# EAGLE board A-2 brd (EAGLE 9.6.2)
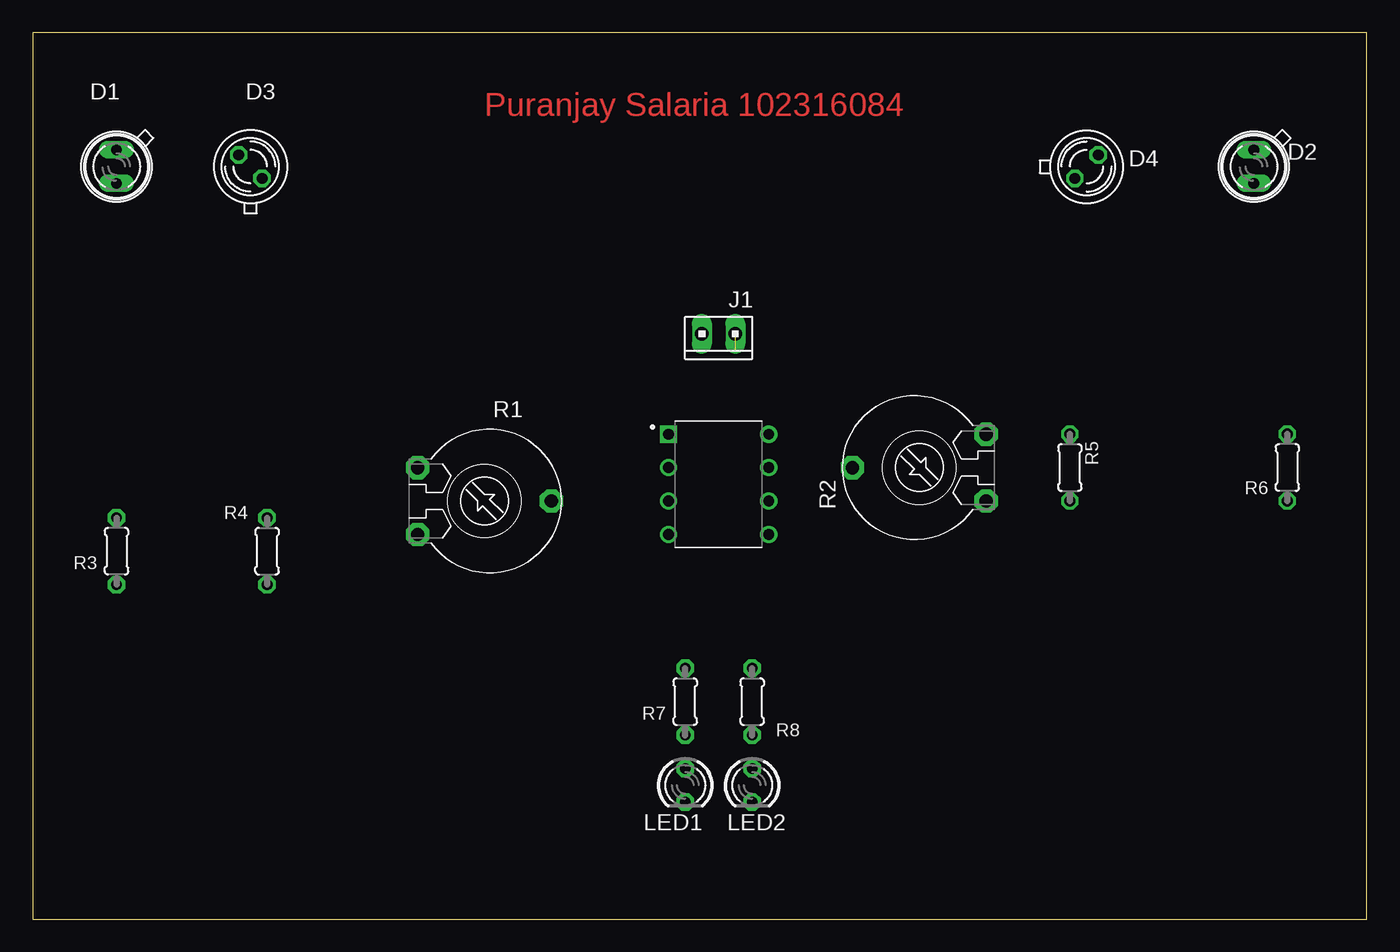
[diagram p0: board, top side]
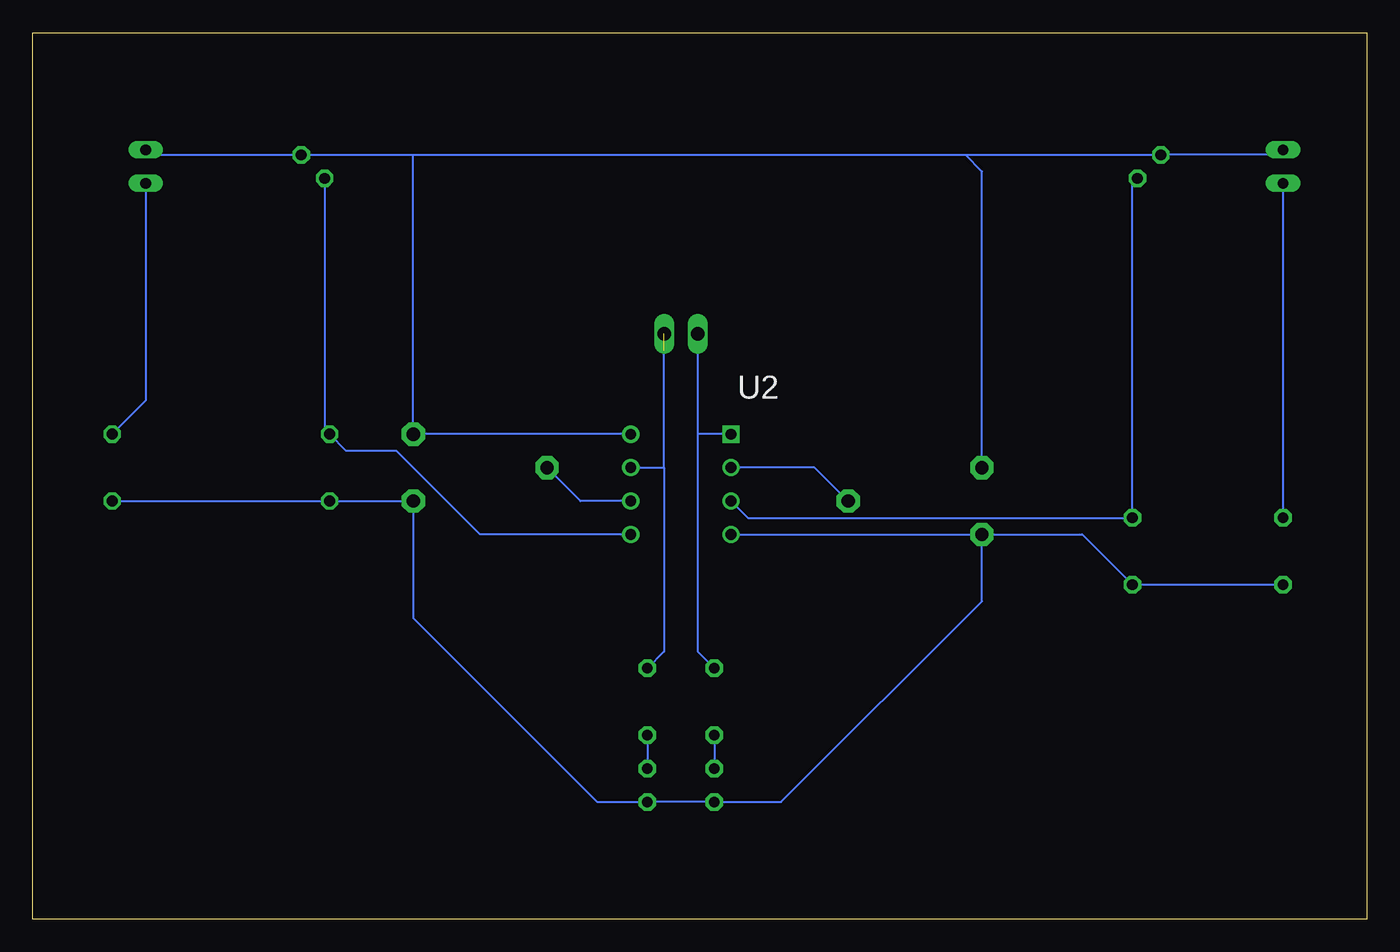
[diagram p1: board, bottom side, seen from below]

Size 101.27 x 67.3 mm. Coordinates in mm from the lower left corner, seen from the top.
Outline: 0,0 101.27,0 101.27,67.3 0,67.3 0,0
Copper layers (1*16): Top 0.035mm / dielectric 1.5mm / Bottom 0.035mm
Design rules "default": minimum track width 6mil, minimum drill 0.35mm, track to track 6mil, track to pad 6mil, pad to pad 6mil, via to via 6mil, smd to smd 6mil, copper to edge 40mil, drill to drill 6mil, minimum pad ring 10mil, minimum via ring 8mil, stop-mask expansion 4mil, vias tented up to drill 0mil, thermal gap 10mil

## Footprints (pad centres in the part's own frame; a part is rotated, then mirrored left to right if it is on the bottom)
SFH482 = drill 0.813 long: A -1.27,0; K 1.27,0
BPX65 = drill 0.813 octagon: A -0.889,-0.889; K 0.889,0.889
10X02MTA = drill 1.016 long: 1 1.27,0; 2 -1.27,0
LED3MM = drill 0.813 octagon: A -1.27,0; K 1.27,0
PT-10 = drill 1.016 pad 1.778 octagon: 1 -2.54,-5.08; 2 2.54,-5.08; 3 0,5.08
0204/5 = drill 0.813 octagon: 1 -2.54,0; 2 2.54,0
DIP762W46P254L960H508Q8 = drill 0.81 pad 1.22 square: 1 -3.81,3.81 | drill 0.81 pad 1.22: 2 -3.81,1.27; 3 -3.81,-1.27; 4 -3.81,-3.81; 5 3.81,-3.81; 6 3.81,-1.27; 7 3.81,1.27; 8 3.81,3.81

## Placement (x,y rotation side)
D1  SFH482  [SFH482]  6.35,57.15 270 top
D2  SFH482  [SFH482]  92.71,57.15 270 top
D3  BPX65  [BPX65]  16.51,57.15 90 top
D4  BPX65  [BPX65]  80.01,57.15 0 top
J1  [10X02MTA]  52.07,44.45 180 top
LED1  [LED3MM]  49.53,10.16 270 top
LED2  [LED3MM]  54.61,10.16 270 top
R1  [PT-10]  34.29,31.75 270 top
R2  [PT-10]  67.31,34.29 90 top
R3  330ohm  [0204/5]  6.35,27.94 90 top
R4  10k  [0204/5]  17.78,27.94 270 top
R5  10k  [0204/5]  78.74,34.29 270 top
R6  330ohm  [0204/5]  95.25,34.29 90 top
R7  330ohm  [0204/5]  49.53,16.51 270 top
R8  330ohm  [0204/5]  54.61,16.51 270 top
U2  LM358N  [DIP762W46P254L960H508Q8]  52.07,33.02 0 top

## Library data of the parts
D1 D2 LED1 LED2 = led
D3 D4 = opto-trans-siemens; MPN: BPX65.; OC_FARNELL: 327451; OC_NEWARK: 06WX2764
J1 = con-amp
R1 R2 = rcl; SPICEMODEL: POT; SPICEPREFIX: X
R3-R8 = rcl; SPICEPREFIX: R
U2 = LM358N; AVAILABILITY: Not in stock; CHECK_PRICES: https://www.snapeda.com/parts/LM358N/Harris/view-part/?ref=eda; DESCRIPTION: General Purpose Amplifier 2 Circuit 8-PDIP; MF: Harris Corporation; MP: LM358N; PACKAGE: None; PRICE: None; SNAPEDA_LINK: https://www.snapeda.com/parts/LM358N/Harris/view-part/?ref=snap

## Nets
N$1: LED1.A R7.2
N$2: D1.A D2.A D3.K D4.K R1.1 R2.2 U2.8
N$3: D1.K R3.2
N$4: D3.A R4.1 U2.3
N$5: LED1.K LED2.K R1.2 R2.1 R3.1 R4.2 R5.2 R6.1 U2.4
N$6: J1.1 R7.1 U2.1
N$7: R1.3 U2.2
N$8: LED2.A R8.2
N$9: J1.2 R8.1 U2.7
N$10: D2.K R6.2
N$11: D4.A R5.1 U2.5
N$13: R2.3 U2.6

## Tracks (layer width: path | path; a pad name or v marks a point on that pad's centre or on a via)
N$1
  Bottom 0.152: R7.2 LED1.A
N$2
  Bottom 0.152: D1.A 6.73,58.04 D3.K 30.48,58.04 | D2.A 92.33,58.04 D4.K | D4.K 76.2,58.04 | 72.39,58.04 30.48,58.04 | 72.39,58.04 R2.2 U2.8 | D4.K 72.39,58.04 | 30.48,58.04 29.21,56.77 R1.1
N$3
  Bottom 0.152: D1.K R3.2
N$4
  Bottom 0.152: D3.A 17.78,55.88 R4.1 46.99,30.48 U2.3
N$5
  Bottom 0.152: R3.1 R4.2 21.59,29.21 R1.2 | R6.1 R5.2 R2.1 72.39,22.86 58.42,8.89 LED2.K LED1.K 44.45,8.89 29.21,24.13 R1.2 | U2.4 R1.2
N$6
  Bottom 0.152: J1.1 50.8,36.83 | 50.8,36.83 50.8,20.32 R7.1 | U2.1 50.8,36.83
N$7
  Bottom 0.152: R1.3 41.91,34.29 U2.2
N$8
  Bottom 0.152: R8.2 LED2.A
N$9  (1 unrouted)
  Bottom 0.152: 53.34,34.29 53.34,20.32 R8.1 | 53.34,34.29 53.34,43.18 | U2.7 53.34,34.29
N$10
  Bottom 0.152: D2.K 92.71,39.37 R6.2
N$11
  Bottom 0.152: U2.5 67.31,29.21 73.66,35.56 77.47,35.56 R5.1 79.12,37.21 D4.A
N$13
  Bottom 0.152: U2.6 59.69,31.75 R2.3

## Text on the board
Top: Puranjay Salaria 102316084